# EAGLE board Wiring Components (EAGLE 9.7.0)

Size 194.9 x 114.55 mm. Coordinates in mm from the lower left corner, seen from the top.
Outline: 0,0 194.9,0 194.9,114.55 0,114.55 0,0
Copper layers (1*16): Top 0.035mm / dielectric 1.5mm / Bottom 0.035mm
Design rules "default": minimum track width 6mil, minimum drill 0.35mm, track to track 6mil, track to pad 6mil, pad to pad 6mil, via to via 6mil, smd to smd 6mil, copper to edge 40mil, drill to drill 6mil, minimum pad ring 10mil, minimum via ring 8mil, stop-mask expansion 4mil, vias tented up to drill 0mil, thermal gap 10mil

## Footprints (pad centres in the part's own frame; a part is rotated, then mirrored left to right if it is on the bottom)
HA-06-SM065 = drill 1 pad 1.676: 1 -2.54,-2.54; 2 0,2.54; 3 2.54,-2.54
SWITCH-SPDT-PTH-8.5X3.7MM = drill 1.016 pad 1.88: 1 -2.54,0; 2 0,0; 3 2.54,0
1X04 = drill 1.016 long: 1 -3.81,0; 2 -1.27,0; 3 1.27,0; 4 3.81,0
JHD-162A = drill 1.016 long: 1 -19.05,0; 2 -16.51,0; 3 -13.97,0; 4 -11.43,0; 5 -8.89,0; 6 -6.35,0; 7 -3.81,0; 8 -1.27,0; 9 1.27,0; 10 3.81,0; 11 6.35,0; 12 8.89,0; 13 11.43,0; 14 13.97,0; 15 16.51,0; 16 19.05,0
ARDUINO-UNO-R3-SHIELD = drill 1.016 pad 1.88: 3.3V 24.13,-2.54; 5V 24.13,0; A0 24.13,12.7; A1 24.13,15.24; A2 24.13,17.78; A3 24.13,20.32; A4 24.13,22.86; A5 24.13,25.4; AREF -24.13,-13.97; D2 -24.13,20.32; D3 -24.13,17.78; D4 -24.13,15.24; D5 -24.13,12.7; D6 -24.13,10.16; D7 -24.13,7.62; D8 -24.13,3.81; D9 -24.13,1.27; D10 -24.13,-1.27; D11 -24.13,-3.81; D12 -24.13,-6.35; D13 -24.13,-8.89; GND@0 24.13,2.54; GND@1 24.13,5.08; GND@2 -24.13,-11.43; IOREF 24.13,-7.62; NC 24.13,-10.16; RES 24.13,-5.08; RX -24.13,25.4; SCL -24.13,-19.05; SDA -24.13,-16.51; TX -24.13,22.86; VIN 24.13,7.62

## Placement (x,y rotation side)
RPOT1  250k  [HA-06-SM065]  166.33,46.01 0 top
S1  TOGGLE  [SWITCH-SPDT-PTH-8.5X3.7MM]  118.07,23.15 0 top
S2  PINHD-1X04_1X04M  [1X04]  179.03,24.42 0 top
S3  PINHD-1X04_1X04M  [1X04]  186.65,42.2 0 top
S4  PINHD-1X04_1X04M  [1X04]  186.65,24.42 0 top
S5  PINHD-1X04_1X04M  [1X04]  179.03,42.2 0 top
U2  LCD-16X2JHD-162A  [JHD-162A]  134.31,77.92 180 top
ULEONARDO  ARDUINO-UNO-R3-SHIELD  [ARDUINO-UNO-R3-SHIELD]  47.88,29.84 270 top

## Library data of the parts
RPOT1 S1-S5 U2 ULEONARDO = Tinkercad

## Nets
S2_4: S2.3 S2.4 ULEONARDO.A2
S3_1: RPOT1.1 S2.1 S2.2 S3.1 S3.2 S4.1 S4.2 S5.1 S5.2 U2.2 U2.15 ULEONARDO.5V
S3_4: S3.3 S3.4 ULEONARDO.A5
S4_4: S4.3 S4.4 ULEONARDO.A1
S5_4: S5.3 S5.4 ULEONARDO.A0
U2_VO: RPOT1.2 U2.3
ULEONARDO_D2: U2.14 ULEONARDO.D2
ULEONARDO_D3: U2.13 ULEONARDO.D3
ULEONARDO_D4: U2.12 ULEONARDO.D4
ULEONARDO_D5: U2.11 ULEONARDO.D5
ULEONARDO_D6: U2.6 ULEONARDO.D6
ULEONARDO_D7: U2.4 ULEONARDO.D7
ULEONARDO_D8: S1.1 ULEONARDO.D8
ULEONARDO_D9: S1.3 ULEONARDO.D9
ULEONARDO_GND: RPOT1.3 S1.2 U2.1 U2.5 U2.16 ULEONARDO.GND@0 ULEONARDO.GND@1 ULEONARDO.GND@2

## Tracks (layer width: path | path; a pad name or v marks a point on that pad's centre or on a via)
S2_4  (2 unrouted)
S3_1  (11 unrouted)
S3_4  (2 unrouted)
S4_4  (2 unrouted)
S5_4  (2 unrouted)
U2_VO  (1 unrouted)
ULEONARDO_D2  (1 unrouted)
ULEONARDO_D3  (1 unrouted)
ULEONARDO_D4  (1 unrouted)
ULEONARDO_D5  (1 unrouted)
ULEONARDO_D6  (1 unrouted)
ULEONARDO_D7  (1 unrouted)
ULEONARDO_D8  (1 unrouted)
ULEONARDO_D9  (1 unrouted)
ULEONARDO_GND  (7 unrouted)